# EAGLE board untitled (EAGLE 8.6.0)
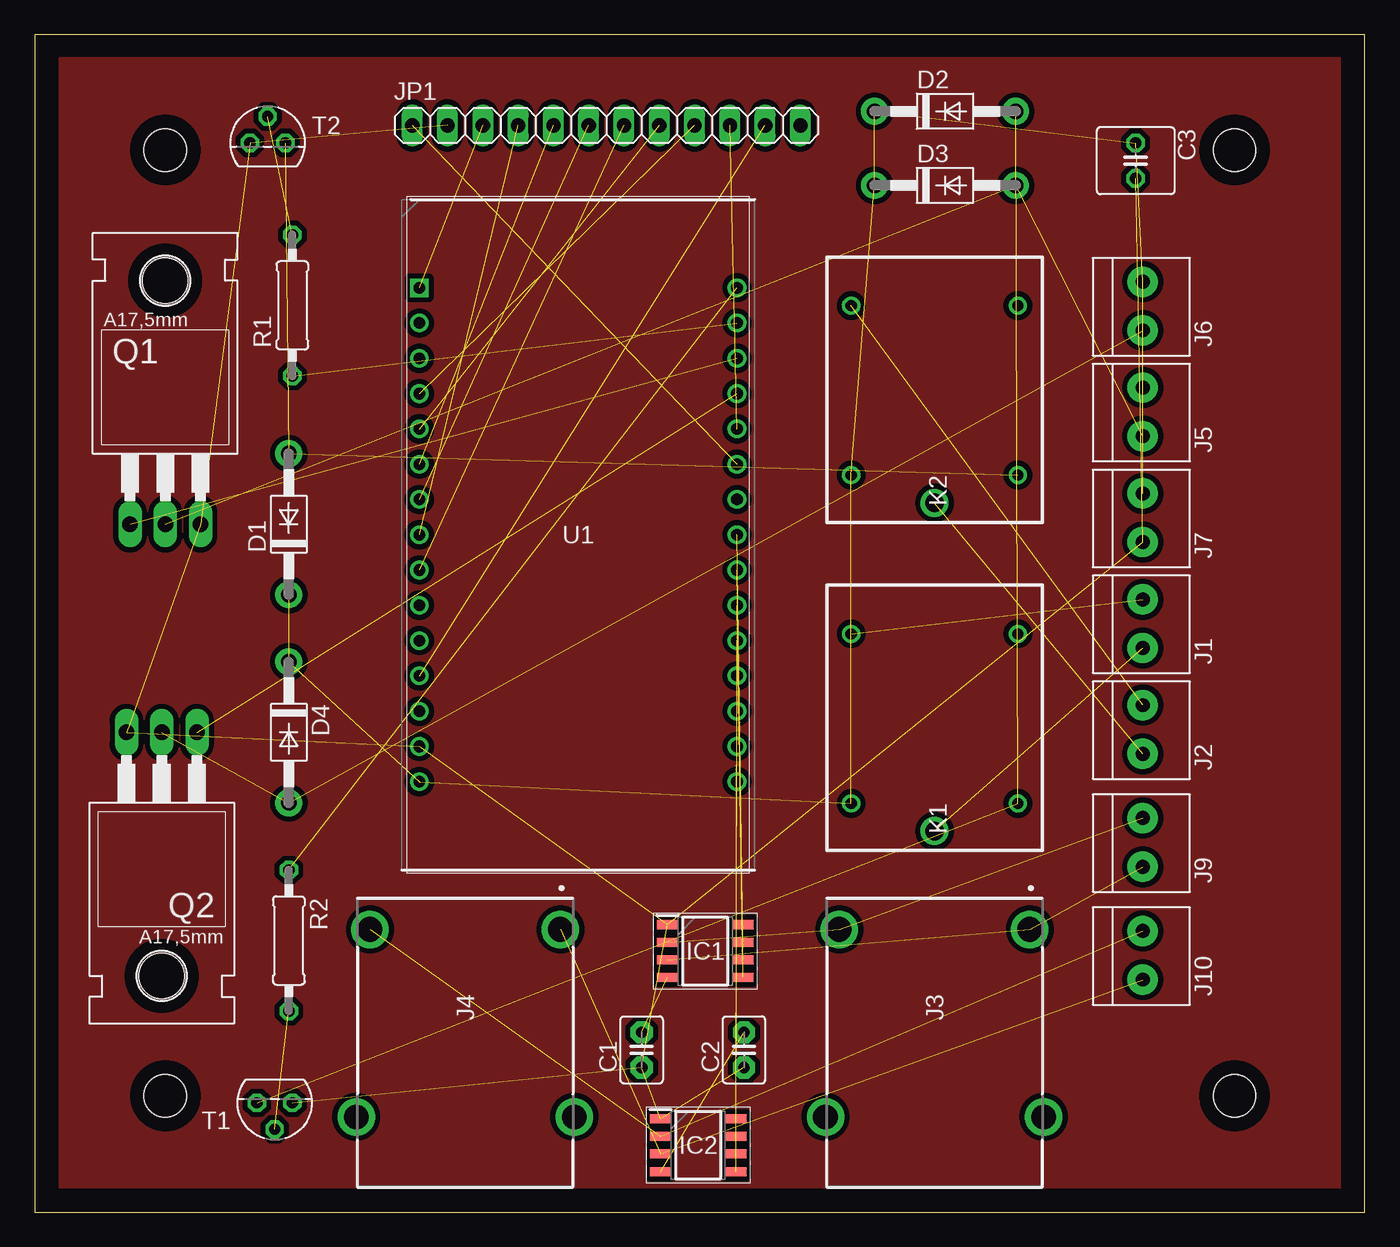
[diagram p0: board, top side]

Size 95.74 x 84.76 mm. Coordinates in mm from the lower left corner, seen from the top.
Outline: 0,0 95.74,0 95.74,84.76 0,84.76 0,0
Copper layers (1*16): Top 0.035mm / dielectric 1.5mm / Bottom 0.035mm
Design rules "default": minimum track width 6mil, minimum drill 0.35mm, track to track 6mil, track to pad 6mil, pad to pad 6mil, via to via 6mil, smd to smd 6mil, copper to edge 40mil, drill to drill 6mil, minimum pad ring 10mil, minimum via ring 8mil, stop-mask expansion 4mil, vias tented up to drill 0mil, thermal gap 10mil
Net classes: 0 default: width 0.381 mm, clearance 0.381 mm; 1 POWER: width 1.27 mm, clearance 0.381 mm
Holes 3.05 mm at 9.4,8.38 86.36,8.38 86.36,76.45 9.4,76.45

## Footprints (pad centres in the part's own frame; a part is rotated, then mirrored left to right if it is on the bottom)
C2.5-3 = drill 0.813 pad 1.6 octagon: 1 -1.27,0; 2 1.27,0
C025-060X050 = drill 0.813 octagon: 1 -1.27,0; 2 1.27,0
DO41-10 = drill 1.118 pad 1.93: A 5.08,0; C -5.08,0
SOIC127P600X175-8N = smd 1.525 x 0.65: 1 -2.712,1.905; 2 -2.712,0.635; 3 -2.712,-0.635; 4 -2.712,-1.905; 5 2.712,-1.905; 6 2.712,-0.635; 7 2.712,0.635; 8 2.712,1.905
1X2-3.5MM = drill 1 pad 2.184: 1 1.8,0; 2 -1.7,0
PCC-SMP = drill 1.77 pad 2.7: 1 2.25,6.85; 2 2.25,-6.85; 3 15.75,7.85; 4 15.75,-7.85
1X12 = drill 1.016 long: 1 -13.97,0; 2 -11.43,0; 3 -8.89,0; 4 -6.35,0; 5 -3.81,0; 6 -1.27,0; 7 1.27,0; 8 3.81,0; 9 6.35,0; 10 8.89,0; 11 11.43,0; 12 13.97,0
SRD = drill 1.34 pad 1.84: 1 0,0 | drill 0.8 pad 1.3: 2 2,6; 3 2,-6; 4 14.2,6; 5 14.2,-6
TO220 = drill 1.118 long: 1 -2.54,-6.35; 2 0,-6.35; 3 2.54,-6.35 | hole 3.302: 0,11.176
0207/10 = drill 0.813 octagon: 1 -5.08,0; 2 5.08,0
TO92 = drill 0.813 octagon: 1 1.27,0; 2 0,1.905; 3 -1.27,0
DIP2286W64P254L4826H735Q30N = drill 0.835 pad 1.235 square: 1 -11.43,17.78 | drill 0.835 pad 1.235: 2 -11.43,15.24; 3 -11.43,12.7; 4 -11.43,10.16; 5 -11.43,7.62; 6 -11.43,5.08; 7 -11.43,2.54; 8 -11.43,0; 9 -11.43,-2.54; 10 -11.43,-5.08; 11 -11.43,-7.62; 12 -11.43,-10.16; 13 -11.43,-12.7; 14 -11.43,-15.24; 15 -11.43,-17.78; 16 11.43,-17.78; 17 11.43,-15.24; 18 11.43,-12.7; 19 11.43,-10.16; 20 11.43,-7.62; 21 11.43,-5.08; 22 11.43,-2.54; 23 11.43,0; 24 11.43,2.54; 25 11.43,5.08; 26 11.43,7.62; 27 11.43,10.16; 28 11.43,12.7; 29 11.43,15.24; 30 11.43,17.78

## Placement (x,y rotation side)
C1  [C2.5-3]  43.69,11.68 90 top
C2  [C2.5-3]  51.05,11.68 90 top
C3  [C025-060X050]  79.25,75.69 270 top
D1  1N4004  [DO41-10]  18.29,49.53 90 top
D2  1N4004  [DO41-10]  65.53,79.25 0 top
D3  1N4004  [DO41-10]  65.53,73.91 0 top
D4  1N4004  [DO41-10]  18.29,34.54 270 top
IC1  MAX31855RASA+  [SOIC127P600X175-8N]  48.26,18.8 0 top
IC2  MAX31855RASA+  [SOIC127P600X175-8N]  47.75,4.83 0 top
J1  1X2-3.5MM  [1X2-3.5MM]  79.76,42.42 270 top
J2  1X2-3.5MM  [1X2-3.5MM]  79.76,34.8 270 top
J3  PCC-SMP-K-100-R-ROHS  [PCC-SMP]  64.77,22.61 270 top
J4  PCC-SMP-K-100-R-ROHS  [PCC-SMP]  30.99,22.61 270 top
J5  1X2-3.5MM  [1X2-3.5MM]  79.76,57.66 270 top
J6  1X2-3.5MM  [1X2-3.5MM]  79.76,65.28 270 top
J7  1X2-3.5MM  [1X2-3.5MM]  79.76,50.04 270 top
J9  1X2-3.5MM  [1X2-3.5MM]  79.76,26.67 270 top
J10  1X2-3.5MM  [1X2-3.5MM]  79.76,18.54 270 top
JP1  [1X12]  41.15,78.23 0 top
K1  SRD-12VDC-SL-C  [SRD]  64.77,27.43 90 top
K2  SRD-12VDC-SL-C  [SRD]  64.77,51.05 90 top
Q1  BUZ10  [TO220]  9.4,55.88 0 top
Q2  BUZ10  [TO220]  9.14,28.19 180 top
R1  [0207/10]  18.54,65.28 90 top
R2  [0207/10]  18.29,19.56 270 top
T1  2N3904  [TO92]  17.27,7.87 180 top
T2  2N3904  [TO92]  16.76,76.96 0 top
U1  113990105  [DIP2286W64P254L4826H735Q30N]  39.12,48.77 0 top

## Library data of the parts
C1 C2 = capacitor-wima
C3 D1-D4 J1 J2 J5-J7 J9 J10 JP1 = adafruit
IC1 IC2 = MAX31855RASA+; DESCRIPTION: Thermocouple-to-Digital, type R SOIC8 Maxim MAX31855RASA+, Thermocouple Amplifier, 3.3 V, 8-Pin SOIC; HEIGHT: 1.75mm; MANUFACTURER_NAME: Maxim Integrated; MANUFACTURER_PART_NUMBER: MAX31855RASA+; RS_PART_NUMBER: 7833891P; SUPPLIER_NAME: RS
J3 J4 = PCC-SMP-K-100-R-ROHS; DESCRIPTION: NEWPORT ELECTRONICS - PCC-SMP-K-100-R-ROHS - CIRCUIT BOARD THERMOCOUPLE, K TYPE; HEIGHT: mm; MANUFACTURER_NAME: NEWPORT ELECTRONICS; MANUFACTURER_PART_NUMBER: PCC-SMP-K-100-R-ROHS; SUPPLIER_NAME: RS
K1 K2 = SRD-12VDC-SL-C; DESCRIPTION: SRD Relay, ISO9002, 10A Switching Cap. Sealed Type, 0.36W, 1 Form C; HEIGHT: mm; MANUFACTURER_NAME: Songle Relay; MANUFACTURER_PART_NUMBER: SRD-12VDC-SL-C; SUPPLIER_NAME: RS
Q1 Q2 = transistor-fet
R1 R2 = resistor
T1 T2 = transistor
U1 = 113990105; DESCRIPTION: NodeMCU DEVKIT V1.0; HEIGHT: 7.35mm; MANUFACTURER_NAME: Seeed Studio; MANUFACTURER_PART_NUMBER: 113990105; SUPPLIER_NAME: RS

## Nets
3V3: JP1.1 U1.25
$N13: D3.A J5.1 Q1.2
A0: JP1.3 U1.1
BLOWER_1: Q1.1 U1.28
BLOWER_2: Q2.1 U1.27
CLK: JP1.7 U1.9
CMD: JP1.6 U1.7
CS_1: IC1.6 U1.22
CS_2: IC2.6 U1.19
D0: JP1.4 U1.8
D1: JP1.5 U1.6
D2: JP1.8 U1.5
D3: JP1.9 U1.4
D4: JP1.10 U1.26
EN: JP1.11 U1.12
GND: C1.1 C2.1 C3.2 IC1.1 IC2.1 J7.1 JP1.2 Q1.3 Q2.3 T1.3 T2.3 U1.14
GND(1): U1.10
GND(3): U1.17
GND(4): U1.24
N$1: R1.2 T2.2
N$2: D1.A K2.3 T2.1
N$3: R2.2 T1.2
N$4 [POWER]: J1.2 K1.4
N$5 [POWER]: J2.2 K2.4
N$7: C1.2 IC1.4
N$8: D2.A K1.3 T1.1
N$9 [POWER]: J2.1 K2.1
N$10: C2.2 IC2.4
N$11 [POWER]: J1.1 K1.1
N$12: D4.A J6.1 Q2.2
NRST: U1.13
RELAY_1: R2.1 U1.30
RELAY_2: R1.1 U1.29
RST: JP1.12
SCK_1: IC1.5 U1.21
SCK_2: IC2.5 U1.18
SO_1: IC1.7 U1.23
SO_2: IC2.7 U1.20
T1+: IC1.3 J3.1 J9.1
T1-: IC1.2 J3.2 J9.2
T2+: IC2.3 J4.1 J10.1
T2-: IC2.2 J4.2 J10.2
VDD: C3.1 D1.C D2.C D3.C D4.C J5.2 J6.2 J7.2 K1.2 K2.2 U1.15
VDD3V3(1): U1.11
VDD3V3(2): U1.16

## Tracks (layer width: path | path; a pad name or v marks a point on that pad's centre or on a via)
3V3  (1 unrouted)
$N13  (2 unrouted)
A0  (1 unrouted)
BLOWER_1  (1 unrouted)
BLOWER_2  (1 unrouted)
CLK  (1 unrouted)
CMD  (1 unrouted)
CS_1  (1 unrouted)
CS_2  (1 unrouted)
D0  (1 unrouted)
D1  (1 unrouted)
D2  (1 unrouted)
D3  (1 unrouted)
D4  (1 unrouted)
EN  (1 unrouted)
GND  (11 unrouted)
GND1
  pour Top: 1.78,1.78 93.98,1.78 93.98,83.06 1.78,83.06
N$1  (1 unrouted)
N$2  (2 unrouted)
N$3  (1 unrouted)
N$4  (1 unrouted)
N$5  (1 unrouted)
N$7  (1 unrouted)
N$8  (2 unrouted)
N$9  (1 unrouted)
N$10  (1 unrouted)
N$11  (1 unrouted)
N$12  (2 unrouted)
RELAY_1  (1 unrouted)
RELAY_2  (1 unrouted)
SCK_1  (1 unrouted)
SCK_2  (1 unrouted)
SO_1  (1 unrouted)
SO_2  (1 unrouted)
T1+  (2 unrouted)
T1-  (2 unrouted)
T2+  (2 unrouted)
T2-  (2 unrouted)
VDD  (10 unrouted)